# Altium PCB PCB1.PcbDoc
Units mil, origin at the board's own origin, x right, y up, seen from the top; angles counter-clockwise.
Board outline 1195.03 x 1463.03 mil, 2 copper layers (Top Layer, Bottom Layer); 22 components, 30 nets, 110 pads, 36 vias.
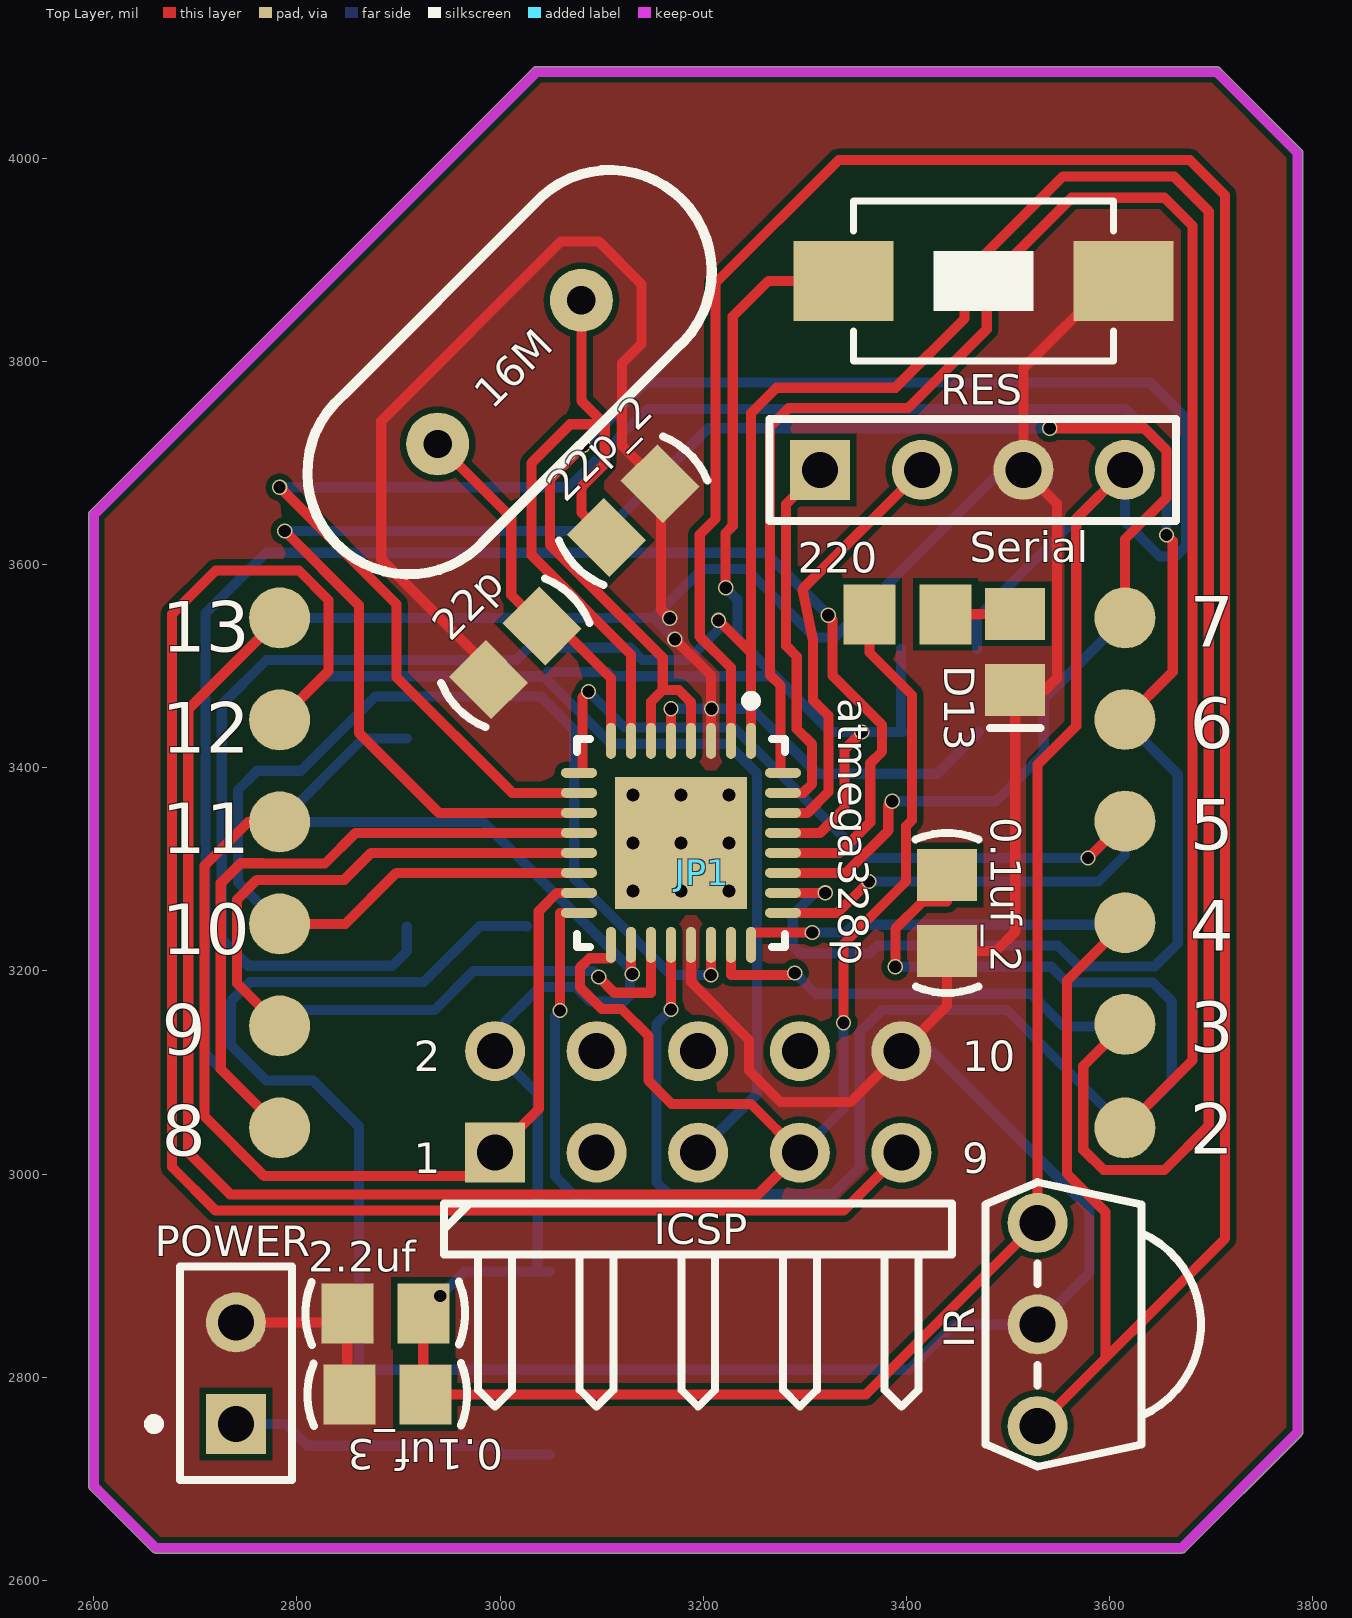
[diagram p0: Top Layer view]
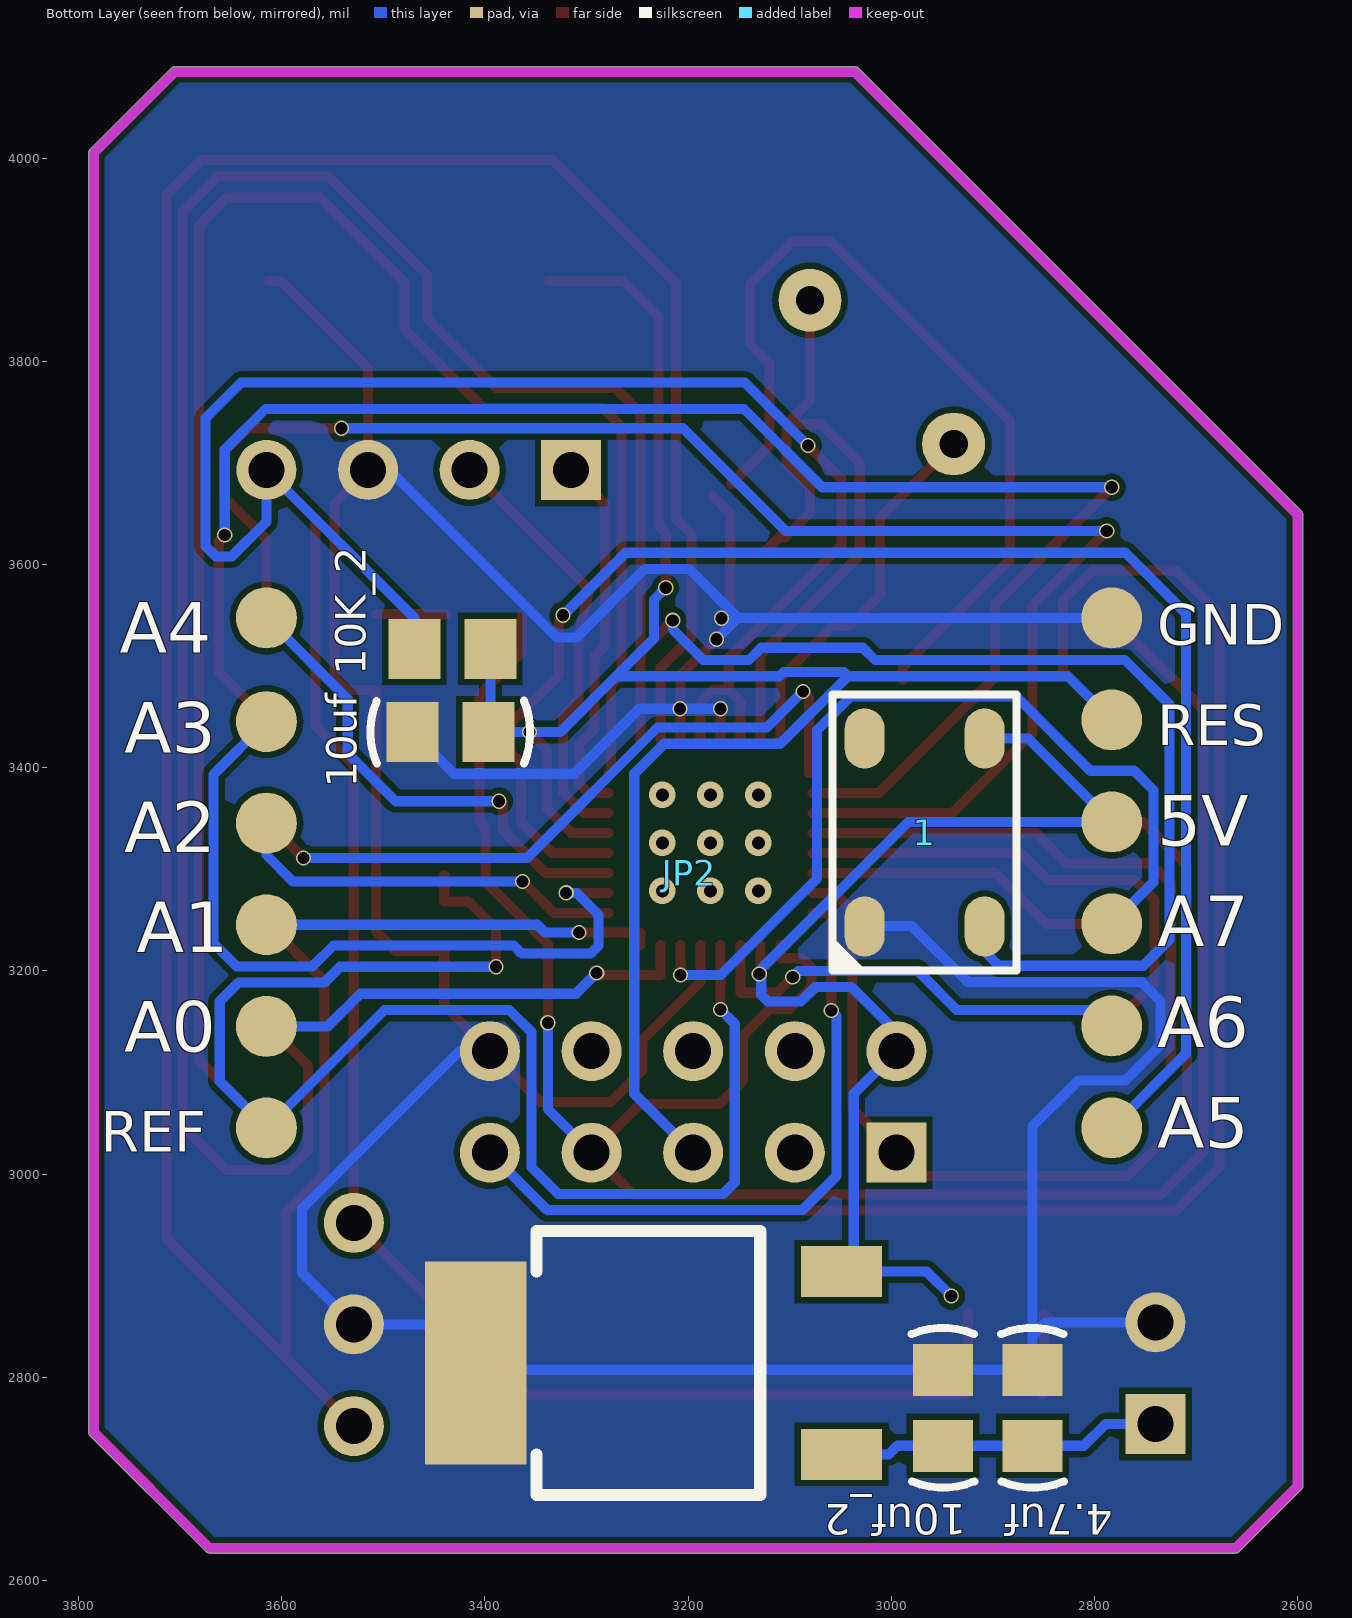
[diagram p1: Bottom Layer view, seen from below]

## Layer stack, top to bottom
Top Layer: signal copper 1.4
Dielectric: dielectric 12.6, FR-4, Dk 4.8
Bottom Layer: signal copper 1.4

## Board outline
2657.45,2628.45 2596.45,2689.45 2596.47,2689.44 cw(c2600,2693) 2594.99,2693 2594.99,3649 cw(c2600,3649) 2596.47,3652.56 2596.45,3652.55 3032.45,4088.55 3032.44,4088.53 cw(c3036,4085) 3036,4090.01 3705,4090.01 cw(c3705,4085) 3709.4,4087.4 cw(c3707,4083) 3710.55,4086.55 3788.55,4008.55 3788.53,4008.56 cw(c3785,4005) 3790.01,4005 3790.01,2746 cw(c3785,2746) 3788.53,2742.44 3788.55,2742.45 3674.55,2628.45 3674.56,2628.47 cw(c3671,2632) 3671,2626.99 2661,2626.99 cw(c2661,2632)

## Design rules (kind name [scope] priority, off if disabled: settings)
Clearance [All] p1: gap=6
PolygonConnect [All] p1: connectstyle=Direct reliefconductorwidth=10 reliefentries=4 polygonreliefangle="90 Angle"
RoutingVias [All] p1: holewidth=12 width=15 viastyle="Through Hole" minholewidth=12 minwidth=15 maxholewidth=12 maxwidth=15
SilkscreenOverComponentPads [All] p1: minsilkscreentomaskgap=10
SolderMaskExpansion [All] p1: expansion=4
Width Width_1 [All] p1: maxlimit=10 minlimit=10 preferedwidth=10
Width [InNet('VCC')] p2: maxlimit=20 minlimit=20 preferedwidth=20
27 further rules are at their usual default settings.

## Classes and differential pairs
component class Sheet1: 0.1uf_2 0.1uf_3 1 2.2uf 4.7uf 10K_2 10uf 10uf_2 16M 22p 22p_2 220 atmega328p D13 ICSP IR POWER RES Serial

## Components (designator, comment, footprint, x,y, rotation, side; value= is the part's Value field where it differs from the comment)
0.1uf_2 "Cap" C-RAD-0805 3440,3257 r90 top
0.1uf_3 "Cap" C-RAD-0805 2889,2783 r180 top
1 "1" WS2812 3105,3035 r270 bottom
2.2uf "Cap Pol1" C-RAD-0805 2887,2863 r180 top
4.7uf "Cap" C-RAD-0805 2861,2770 r90 bottom
10K_2 "Res2" 0805-2 3432,3517 r0 bottom
10uf "Cap Pol1" C-RAD-0805 3434,3435 r0 bottom
10uf_2 "Cap Pol1" C-RAD-0805 2949,2770 r90 bottom
16M "XTAL" XTAL2 3080,3860 r45 top
22p "Cap" C-RAD-0805 3015,3513 r225 top
22p_2 "Cap" C-RAD-0805 3131,3653 r45 top
220 "Res2" 0805-2 3401,3551 r180 top
atmega328p "atmega328p" 32M1-A_M 3178,3326 r270 top locked
D13 "LED0" LED_0805 3507,3514 r270 top
ICSP "Header 5X2H" HDR2X5H 2995,3021 r0 top
IR "Header 3" HS0038B 3529,2852 r90 top
JP1 "HEADER 6X2" ssssop_12 3456,3294.4 r180 top
JP2 "HEADER 6X2" ssssop_12 3456,3298.4 r180 bottom
POWER "CON2" PIN2 2740,2754 r90 top
RES "SW-PB" SW_PB2_A1 3478,3879 r90 top
Serial "Header 4" HDR1X4 3315,3693 r0 top
? "78M05" TO-252 3049,2724 r90 bottom

## Footprints (in the part's own frame and the unit in brackets; to place one, negate y for a bottom-side part, rotate by r counter-clockwise, add the part's x,y. Pads: shape width x height; smd on the part's side, far side on the other; paste and mask are expansions set on the pad)
32M1-A_M [mm] "32-Pin Quad Flat No-Lead 0.5 mm Pitch, IPC Low Density"
  oval 0.9x0.25 smd: 1(-2.55,1.75) 2(-2.55,1.25) 3(-2.55,0.75) 4(-2.55,0.25) 5(-2.55,-0.25) 6(-2.55,-0.75) 7(-2.55,-1.25) 8(-2.55,-1.75) 17(2.55,-1.75) 18(2.55,-1.25) 19(2.55,-0.75) 20(2.55,-0.25) 21(2.55,0.25) 22(2.55,0.75) 23(2.55,1.25) 24(2.55,1.75)
  oval 0.25x0.9 smd: 9(-1.75,-2.55) 10(-1.25,-2.55) 11(-0.75,-2.55) 12(-0.25,-2.55) 13(0.25,-2.55) 14(0.75,-2.55) 15(1.25,-2.55) 16(1.75,-2.55) 25(1.75,2.55) 26(1.25,2.55) 27(0.75,2.55) 28(0.25,2.55) 29(-0.25,2.55) 30(-0.75,2.55) 31(-1.25,2.55) 32(-1.75,2.55)
  rect 3.3x3.3 smd: 33(0,0)
  silkscreen extent -3.67,-2.6 2.6,2.6, body extent -2.58,-2.58 2.58,2.58, height 1
0805-2 [mm] "ÌùÆ"
  rect 1.3x1.5 smd: 1(-0.95,0) 2(0.95,0)
C-RAD-0805 [mm] "ÌùÆ"
  rect 1.3x1.5 smd: 1(-0.95,0) 2(0.95,0)
  silkscreen extent -2,-0.79 2,0.79, body extent -1.27,-0.64 1.27,0.64, height 0.9
HDR1X4 [mm] "Connector; Header; 4 Position"
  rect 1.5x1.5 hole 0.9: 1(0,0)
  round 1.5 hole 0.9: 2(2.54,0) 3(5.08,0) 4(7.62,0)
  silkscreen extent -1.27,-1.27 8.89,1.27
HDR2X5H [mm] "Connector; Header; 5x2 Position; Right Angle"
  rect 1.5x1.5 hole 0.9: 1(0,0)
  round 1.5 hole 0.9: 2(0,2.54) 3(2.54,0) 4(2.54,2.54) 5(5.08,0) 6(5.08,2.54) 7(7.62,0) 8(7.62,2.54) 9(10.16,0) 10(10.16,2.54)
  silkscreen extent -1.27,-6.35 11.43,-1.27
HS0038B [mm] "ºìÍ"
  round 1.5 hole 0.9: 1(-2.54,0) 2(0,0) 3(2.54,0)
  silkscreen extent -3.56,-4.08 3.56,1.3
LED_0805 [mm]
  rect 1.3x1.5 smd: 1(-0.95,0) 2(0.95,0)
  silkscreen extent 1.91,-0.63 1.91,0.64
PIN2 [mm] "Photosensitive Diode"
  rect 1.5x1.5 hole 0.9: 1(0,0)
  round 1.5 hole 0.9: 2(2.54,0)
  silkscreen extent -1.4,-1.4 3.94,2.17
ssssop_12 [mil]
  round 60 smd: 1(-159,249) 2(673,249) 3(-159,147) 4(673,148.6) 5(-159,47) 6(673,48.2) 7(-159,-53) 8(673,-52.2) 9(-159,-153) 10(673,-152.6) 11(-159,-253) 12(673,-253)
SW_PB2_A1 [mm]
  rect 2x2.5 smd: 1(0,3.556) 2(0,-3.444)
  silkscreen extent -2,-3.19 2,3.31, body extent -2.03,-3.17 2.03,3.3, height 1.2
TO-252 [mil]
  rect 50x80 smd: 1(0,0) 3(180,0)
  rect 200x100 smd: 2(90,360)
  silkscreen extent -40,80 220,300
WS2812 [mm]
  oval 1.5x1 smd: 1(-10,5) 2(-10,2) 3(-5.3,2) 4(-5.3,5)
  silkscreen extent -11.1,1.2 -4.2,5.8
XTAL2 [mil]
  round 62 hole 28: 1(0,0) 2(-200,0)
  silkscreen extent -340,-100 140,100

## Part data
0.1uf_2 0.1uf_3 4.7uf 22p 22p_2: "Capacitor"
1: library part BRIDGE2, "Diode"
2.2uf 10uf 10uf_2: "Polarized Capacitor (Radial)"
10K_2 220: "Resistor"
D13: "发光二"
ICSP: "Header, 5-Pin, Dual row, Right Angle"
IR: "Header, 3-Pin"
POWER: "Connector"
RES: "微动"
Serial: "Header, 4-Pin"

## Free pads (board coordinates)
  round 15 hole 12: 1(2941,2880)

## Via types
v1: diameter 15, hole 12, Top Layer to Bottom Layer, tented both sides, 27 vias
v2: diameter 25.98, hole 12.99, Top Layer to Bottom Layer, tented both sides, 9 vias

## Nets (pads, with @x,y where several pads share a name; then routed paths per layer and width w, separated by ;. In a path a pad name is that pad's centre, name@x,y a point inside that pad or via, vN(x,y) a via of type N, cw(c..) or ccw(c..) an arc to the next point about the centre after c; other vN are vias at no path point)
A0: atmega328p.23 JP2.9 | length 440
  Top Layer w10: atmega328p.23 3227.21,3196 3288,3196 v1(3290,3198)
  Bottom Layer w10: v1(3290,3198) 3310.47,3177.53 3522.47,3177.53 3554.6,3145.4 JP2.9
A1: atmega328p.24 JP2.7 | length 383.4
  Top Layer w10: atmega328p.24 3246.9,3237.68 v1(3307.28,3237.68)
  Bottom Layer w10: v1(3307.28,3237.68) 3340.6,3237.68 3348.32,3245.4 JP2.7
A2: atmega328p.25 JP2.5 | length 391.6
  Top Layer w10: atmega328p.25 3332.1,3257.1 v1(3363,3288)
  Bottom Layer w10: v1(3363,3288) 3589,3288 3615,3314 JP2.5
A3: atmega328p.26 JP2.3 | length 756.1
  Top Layer w10: atmega328p.26 v1(3320,3276.79)
  Bottom Layer w10: v1(3320,3276.79) 3309.79,3276.79 3288,3255 3288,3225 3296,3217 3363.62,3217 3371.62,3225 3549,3225 3569.6,3204.4 3644.4,3204.4 3667,3227 3667,3393.4 JP2.3
A4: atmega328p.27 JP2.1 | length 486.5
  Top Layer w10: atmega328p.27 3340.47,3296.47 3382,3338 3382,3363 v1(3386,3367)
  Bottom Layer w10: v1(3386,3367) 3488,3367 3535,3414 3535,3467.4 JP2.1
A5: atmega328p.28 JP2.12 | length 1528.8
  Top Layer w10: atmega328p.28 3334.16,3316.16 3364.35,3346.35 3364.35,3404.35 3376,3416 3376,3442 3327,3491 3327,3546 v1(3323,3550)
  Bottom Layer w10: JP2.12 2710,3118.4 2710,3552 2769.5,3611.5 3261.5,3611.5 v1(3323,3550)
A6: atmega328p.19 JP2.10 | length 444
  Top Layer w10: v1(3097,3194) 3112.5,3178.5 3148.5,3178.5 atmega328p.19@3148.5,3215.89 ; atmega328p.19@3148.47,3215.89 atmega328p.19
  Bottom Layer w10: JP2.10 2798.73,3161.53 2935.53,3161.53 2974,3200 3091,3200 v1(3097,3194)
A7: atmega328p.22 JP2.8 | length 881.1
  Top Layer w10: v1(3207.53,3196) atmega328p.22
  Bottom Layer w10: JP2.8 2742,3287.2 2742,3378 2761,3397 2804,3397 2877,3470 3040,3470 3072.95,3437.05 3072.95,3291 3167.95,3196 v1(3207.53,3196)
AREF: 0.1uf_2.2 atmega328p.20 JP2.11 | length 1461.6
  Top Layer w10: v1(3168.16,3162) atmega328p.20 ; v1(3389,3204) 3389,3241.36 3416,3268.36 3440,3268.36 0.1uf_2.2
  Bottom Layer w10: v1(3168.16,3162) 3154,3147.84 3154,2992 3165.53,2980.47 3328,2980.47 3354,3006.47 3354,3139.53 3376,3161.53 3498.87,3161.53 JP2.11 3661,3091.4 3661,3170 3642.6,3188.4 3558,3188.4 3542.4,3204 v1(3389,3204)
D2: atmega328p.32 JP1.1 | length 1810.7
  Top Layer w10: atmega328p.32 3276,3394.9 3276,3481 3265.5,3491.5 3265.5,3735.5 3284,3754 3401.63,3754 3479,3831.37 3479,3877.41 3562.59,3961 3654,3961 3681.47,3933.53 3681.47,3111.88 JP1.1
D3: 1.4 atmega328p.1 JP1.3 | length 3137.3
  Top Layer w10: v1(3215,3545) 3246.9,3513.1 ; atmega328p.1 3246.9,3513.1 ; JP1.3 3574,3106.4 3574,3024 3594,3004 3654,3004 3697.47,3047.47 3697.47,3947.53 3663,3982 3554,3982 3457,3885 3457,3842 3389,3774 3272,3774 3246.9,3748.9 3246.9,3513.1
  Bottom Layer w10: 1.4 2908.15,3219.13 2894.02,3205 2752,3205 2726,3231 2726,3462 2770,3506 3016,3506 3028,3518 3128,3518 3140,3506 3185,3506 3215,3536 v1(3215,3545)
D4: atmega328p.2 IR.1 JP1.5 | length 2791.3
  Top Layer w10: atmega328p.2 3227.21,3498.29 3196.5,3529 3196.5,3629.5 3212,3645 3212,3877 3333,3998 3679,3998 3713.47,3963.53 3713.47,2936.47 IR.1 ; 3596,2819 3596,2962.44 3558,3000.44 3558,3190.4 JP1.5
D5: atmega328p.9 JP1.7 | length 697
  Top Layer w10: atmega328p.9 3081,3394.9 3081,3469 v1(3087,3475) ; v1(3578.6,3311) JP1.7
  Bottom Layer w10: v1(3087,3475) 3122.5,3439.5 3230.13,3439.5 3358.63,3311 v1(3578.6,3311)
D6: atmega328p.10 JP1.9 | length 1672.4
  Top Layer w10: v1@2783,3678 v1(2783,3676) 2898,3561 2898,3489 3011.79,3375.21 atmega328p.10 ; JP1.9 3662,3494.4 3662,3623 v1(3656,3629)
  Bottom Layer w10: v1(2783,3676) 3068,3676 3145,3753 3616,3753 3656,3713 v1(3656,3629)
D7: atmega328p.11 JP1.11 | length 1578.7
  Top Layer w10: v1(2788,3633) 2861,3560 2861,3434.27 2939.74,3355.53 atmega328p.11 ; v1(3541,3734) 3634,3734 3656,3712 3656,3666 3615,3625 JP1.11
  Bottom Layer w10: v1(2788,3633) 3104,3633 3205,3734 v1(3541,3734)
D8: atmega328p.12 JP1.2 | length 638.3
  Top Layer w10: JP1.2 2725,3103.4 2725,3286.2 2744.8,3306 2765.62,3306 2766.02,3305.6 2827.6,3305.6 2857.84,3335.84 atmega328p.12
D9: atmega328p.13 JP1.4 | length 497.3
  Top Layer w10: JP1.4 2741,3187.8 2741,3270 2760.6,3289.6 2846.6,3289.6 2873.16,3316.16 atmega328p.13
D10: atmega328p.14 JP1.6 | length 315.4
  Top Layer w10: JP1.6 2847.59,3246.2 2897.86,3296.47 atmega328p.14
D11: atmega328p.15 ICSP.1 JP1.8 | length 961
  Top Layer w10: JP1.8 2752,3346.6 2709,3303.6 2709,3057 2768,2998 2972,2998 ICSP.1 3038,3064 3038,3258.79 3056,3276.79 atmega328p.15
D12: atmega328p.16 ICSP.9 JP1.10 | length 2283.2
  Top Layer w10: JP1.10 2831,3495 2831,3565 2802,3594 2720,3594 2677,3551 2677,3007 2720,2964 3338,2964 ICSP.9 ; v1(3059,3161) 3059,3257.1 atmega328p.16
  Bottom Layer w10: v1(3059,3161) 3054,3156 3054,2998 3087.53,2964.47 3338.47,2964.47 ICSP.9
D13: 220.2 atmega328p.17 ICSP.7 JP1.12 | length 2168.9
  Top Layer w10: JP1.12 2693,3457.4 2693,3021.4 2734.4,2980 3254,2980 ICSP.7 3247,3069 3169,3069 3146,3092 3146,3136 3119.5,3162.5 3100,3162.5 3078.5,3184 3078.5,3203 3088,3212.5 3109.1,3212.5 atmega328p.17 ; v1(3338,3149) 3338,3226.53 3399.47,3288 3399.47,3342.3 3405.45,3348.28 3405.45,3471.55 3363.6,3513.4 220.2
  Bottom Layer w10: ICSP.7 3338,3064 v1(3338,3149)
GND: 0.1uf_2.1 0.1uf_3.2 1.3 2.2uf.2 4.7uf.2 10uf.2 10uf_2.2 22p.2 22p_2.2 ?.2 atmega328p.3 atmega328p.5 atmega328p.21 D13.2 ICSP.10 IR.2 JP2.2 POWER.2 RES.2 Serial.3 | length 6166.4
  Top Layer w10: POWER.2 2840.6,2854 2.2uf.2 2849.6,2785 0.1uf_3.2 ; 22p.2 2988.55,3499.45 2883,3605 2883,3741 3060,3918 3097,3918 3139,3876 3139,3817 3120,3798 3120,3716.89 22p_2.2 ; v1(3167,3547) 3158.45,3555.55 3158.45,3650.45 22p_2.2@3175.45,3667.45 ; atmega328p.5 v1(3168.16,3458) ; v1(3172,3526.4) 3207.53,3490.87 atmega328p.3 ; atmega328p.21 3187.84,3189.16 3245,3132 3245,3102 3276,3071 3345,3071 ICSP.10 3440,3166 0.1uf_2.1 3488,3219.6 3507,3238.6 D13.2 3536.6,3476.6 3548,3488 3548,3660 Serial.3 3515,3793 3601,3879 RES.2
  Bottom Layer w10: POWER.2 2848,2854 2861,2841 ; 1.3 3026.26,3244 2979.87,3244 2924.87,3189 2754,3189 2735,3170 2735,3127 2770,3092 2816,3092 2861,3047 2861,2841 ; v1(3167,3547) 3166.6,3547.4 3151,3547.4 ; v1(3168.16,3458) 3248,3458 3312,3394 3430.4,3394 10uf.2 10uf.2@3471,3435 ; v1(3172,3526.4) 3151,3547.4 ; ICSP.10 3425,3121 3580,2966 3580,2903 IR.2 3447,2852 ?.2 3402.4,2807.4 10uf_2.2 4.7uf.2 2861,2841 ; Serial.3 3494,3693 3329,3528 3310,3528 3242.5,3595.5 3199,3595.5 3150.95,3547.45 ; 3150.9,3547.4 3150.95,3547.45 ; 3150.9,3547.4 3151,3547.4 ; 3150.9,3547.4 JP2.2 3150.95,3547.45 ; 3150.95,3547.45 3151,3547.4
  other v1: 3208,3458
Net16M_1: 16M.1 22p_2.1 atmega328p.7 | length 690.8
  Top Layer w10: 16M.1 3080,3761 3103,3738 ; 22p_2.1@3104,3633.11 22p_2.1@3122.55,3614.55 ; 22p_2.1 3080,3651.11 3080,3676 3103,3699 3103,3738 ; atmega328p.7 3128.79,3511.21 3031,3609 3031,3700 3069,3738 3103,3738
Net16M_2: 16M.2 22p.1 atmega328p.8 | length 372.3
  Top Layer w10: 16M.2 3011,3646.16 3011,3569.89 22p.1 3057.66,3539.45 3109.1,3488 atmega328p.8
Net220_1: 220.1 D13.1 | length 68.8
  Top Layer w10: 220.1 3472,3551 3472.4,3551.4 D13.1
RESET: 10K_2.1 10uf.1 atmega328p.29 ICSP.5 JP2.4 RES.1 | length 2041
  Top Layer w10: v1(3222,3577) 3222,3631 3229,3638 3229,3844 3264,3879 RES.1 ; atmega328p.29 3314.95,3335.84 3339.11,3360 3339.11,3418.11 v1(3356,3435)
  Bottom Layer w10: JP2.4 2826,3490 3042.63,3490 ; ICSP.5 3253,3079 3253,3394 3223.5,3423.5 3109.13,3423.5 3042.63,3490 ; v1(3222,3577) 3233.5,3565.5 3233.5,3527.42 3270.92,3490 ; 10K_2.1 3394.6,3437 10uf.1 v1(3356,3435) 3325.92,3435 3270.92,3490 ; 3042.63,3490 3046.76,3494.13 3106,3494.13 3110.12,3490 3270.92,3490
RX: atmega328p.30 Serial.2 | length 426.2
  Top Layer w10: atmega328p.30 3302.64,3355.53 3323.11,3376 3323.11,3451.28 3308,3466.39 3308,3525.5 3297.5,3575.5 Serial.2
TX: atmega328p.31 Serial.1 | length 365.8
  Top Layer w10: atmega328p.31 3298.32,3375.21 3307.11,3384 3307.11,3423 3292,3438.11 3292,3509.5 3281.5,3520 3281.5,3659.5 Serial.1
VCC: 0.1uf_3.1 1.1 2.2uf.1 10K_2.2 ?.3 atmega328p.4 atmega328p.6 atmega328p.18 ICSP.2 IR.3 JP2.6 pad.1 Serial.4 | length 4260.2
  Top Layer w10: 2.2uf.1 2924.4,2785 0.1uf_3.1 3360,2783 IR.3 3529,3403 3567,3441 3567,3645 Serial.4 ; v1(3082,3717) 3049,3684 3049,3619.32 3160,3508.32 3160,3476.5 ; atmega328p.18 3128.79,3198.21 v1(3130,3197) ; atmega328p.6 3148.47,3464.97 3160,3476.5 ; 3160.5,3476.5 3160.25,3476.25 3160,3476.5 ; 3175.82,3476.5 3186.66,3465.66 3186.66,3464.66 3187.84,3464.66 ; atmega328p.4 3187.84,3464.66 ; 3160,3476.5 3176,3476.5 3187.84,3464.66
  Bottom Layer w10: 1.1 2865.1,3428.7 JP2.6 2983.4,3346.6 3128,3202 3128,3176.3 3121.7,3170 3088.87,3170 3074.87,3184 3039,3184 2995,3140 ICSP.2 3037,3079 ?.3@3037,2904 ; pad.1 2965,2904 ?.3@3037,2904 ; ?.3 ?.3@3037,2904 ; v1(3082,3717) 3144,3779 3640,3779 3675,3744 3675,3618 3665,3608 3649,3608 3615,3642 Serial.4 3469.4,3547.4 10K_2.2 ; IR.3@3521,2944 IR.3
VIN: 4.7uf.1 10uf_2.1 ?.1 POWER.1 | length 321.4
  Bottom Layer w10: POWER.1 2789,2754 2810.4,2732.6 4.7uf.1 10uf_2.1 2994,2732.6 3002.6,2724 ?.1
pads on no net: 1.2 atmega328p.33 ICSP.3 ICSP.4 ICSP.6 ICSP.8
copper on no net:
  other v2: 3130.76,3278.76 3178,3278.76 3225.24,3278.76 3130.76,3326 3178,3326 3225.24,3326 3130.76,3373.24 3178,3373.24 3225.24,3373.24

## Polygon pours and split planes (outlines as drawn)
GND on Bottom Layer "Top Layer-No Net" (solid, remove dead copper, pour order 4): 3042,4114 3724,4114 3831,4007 3831,2721 3828,2721 3686,2579 3683,2576 2666,2576 2614,2576 2527,2663 2515,2675 2515,3603
GND on Top Layer "Top Layer-No Net" (solid, remove dead copper, pour order 6): 3024,4106 3723,4106 3726,4109 3810,4025 3843,4025 3843,2732 3692,2581 3682,2571 2659,2571 2604,2571 2518,2657 2503,2672 2503,3629

## Keep-outs
Keep-Out Layer:
  lines w10: 3705,4085 3036,4085 2600,3649 2600,2693 2661,2632 3671,2632 3785,2746 3785,4005 3707,4083

## Silkscreen, mask and mechanical layers (free items; w line width, h text height)
Top Overlay:
  text "7" at 3679,3519 h50
  text "13" at 2667,3514 h50
  text "6" at 3679,3419.2 h50
  text "12" at 2667,3414.8 h50
  text "5" at 3679,3319.4 h50
  text "11" at 2667,3315.6 h50
  text "4" at 3679,3219.6 h50
  text "10" at 2667,3216.4 h50
  text "3" at 3679,3119.8 h50
  text "9" at 2667,3117.2 h50
  text "2" at 3679,3020 h50
  text "8" at 2667,3018 h50
Bottom Overlay:
  text "GND" at 2738.23,3521 h40
  text "A4" at 3759.48,3513 h50
  text "RES" at 2738.23,3422 h40
  text "A3" at 3754.72,3414.8 h50
  text "5V" at 2738.23,3323 h50
  text "A2" at 3754.72,3316.6 h50
  text "A7" at 2738.23,3224 h50
  text "A1" at 3742.82,3218.4 h50
  text "A6" at 2738.23,3125 h50
  text "A0" at 3754.72,3120.2 h50
  text "A5" at 2738.23,3026 h50
  text "REF" at 3778,3022 h40

## Text inside footprints (layer, text, board x,y; h text height)
ICSP: Top Overlay "10" at 3455,3101 h30; Top Overlay "9" at 3455,3001 h30; Top Overlay "1" at 2915,3001 h30; Top Overlay "2" at 2915,3101 h30